# Altium PCB EncoderDebouncer.PcbDoc
Units mil, origin at the board's own origin, x right, y up, seen from the top; angles counter-clockwise.
Board outline 534.98 x 745.08 mil, 2 copper layers (Top Layer, Bottom Layer); 7 components, 6 nets, 26 pads, 2 vias.
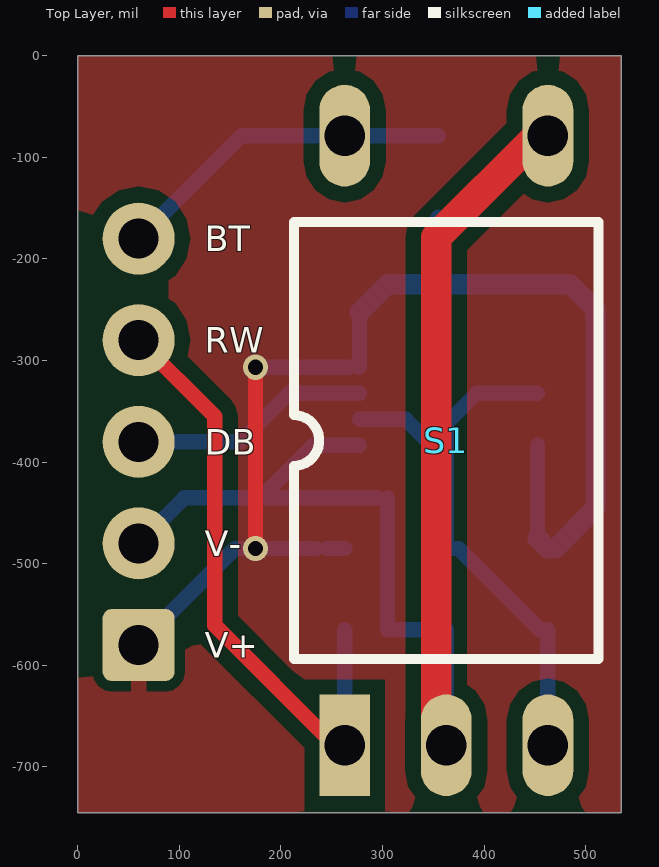
[diagram p0: Top Layer view]
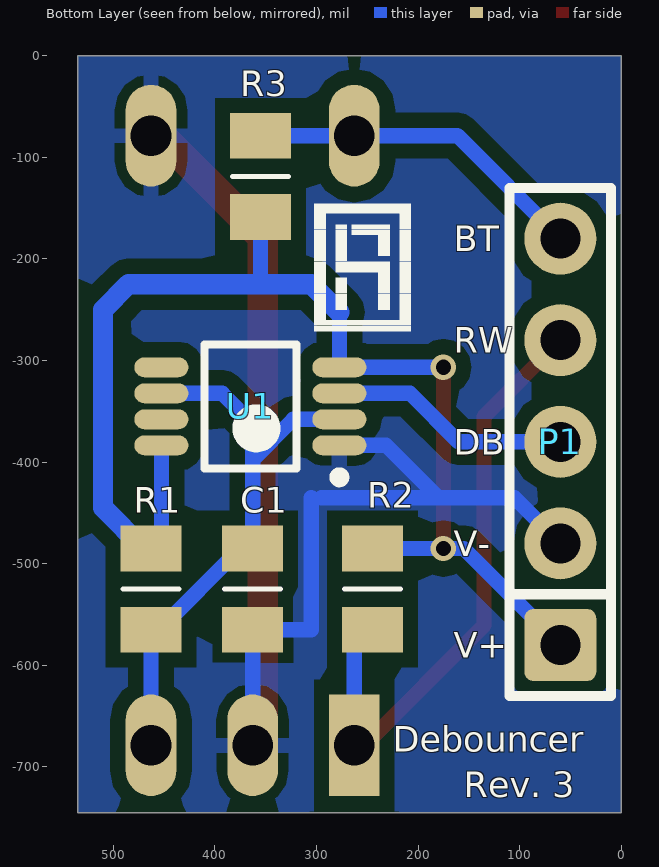
[diagram p1: Bottom Layer view, seen from below]

## Layer stack, top to bottom
Top Solder: solder mask 0.4, Solder Resist, Dk 3.5
Top Layer: signal copper 1.4
Dielectric 1: dielectric 12.6, FR-4, Dk 4.8
Bottom Layer: signal copper 1.4
Bottom Solder: solder mask 0.4, Solder Resist, Dk 3.5

## Board outline
0.02,-745 535,-745 535,0.08 0.02,0.08

## Design rules (kind name [scope] priority, off if disabled: settings)
Clearance PourClearance [InPolygon] p1: gap=15 ignorepadtopadclearanceinfootprint=TRUE except(0.1: Fill-Text Poly-Text Region-Text)
Clearance [All] p2: gap=6 ignorepadtopadclearanceinfootprint=TRUE
ComponentClearance [All] p1 off: gap=10 collisioncheckmode=3 verticalgap=10 showdistances=FALSE
Height [All] p1 off: minheight=0 maxheight=1000 prefheight=500
HoleSize [All] p1: absolutevalues=TRUE maxlimit=99999 minlimit=11.81 maxpercent=80.000 minpercent=20.000
PolygonConnect [All] p1: thpad.connectstyle=Relief thpad.reliefconductorwidth=15 thpad.reliefentries=4 thpad.polygonreliefangle="90 Angle" thpad.airgapwidth=10 smdpad.connectstyle=Relief smdpad.reliefconductorwidth=15 smdpad.reliefentries=4 smdpad.polygonreliefangle="90 Angle" smdpad.airgapwidth=10 via.connectstyle=Direct via.reliefconductorwidth=15 via.reliefentries=4 via.polygonreliefangle="90 Angle" via.airgapwidth=10
RoutingVias [All] p1: holewidth=15 width=25 viastyle="Through Hole" minholewidth=15 minwidth=25 maxholewidth=28 maxwidth=50
SilkToSilkClearance [All] p1 off: silktosilkclearance=10
SilkToSolderMaskClearance [IsPad] p1 off: minsilkscreentomaskgap=10 clearancetoexposedcopper=TRUE
SolderMaskExpansion [All] p1: expansion=4
Width [All] p1: maxlimit=50 minlimit=6 preferedwidth=10
25 further rules are at their usual default settings.

## Components (designator, comment, footprint, x,y, rotation, side; value= is the part's Value field where it differs from the comment)
C1 "Cap" 0805-CAP 362.77,-525 r90 bottom value=0.1uF
P1 "Header 5" "Pin Header 1x5 TH Pitch 2.54mm" 60,-580 r90 bottom
R1 "Res1" 0805-RES 462.77,-525 r90 bottom value=10K
R2 "Res1" 0805-RES 245,-525 r90 bottom value=10K
R3 "Res1" 0805-RES 355,-118.66 r270 bottom value=10K
S1 "Rotary Encoder" Encoder 262.77,-678.66 r90 top locked
U1 "555" TI-LM555 365,-345 r0 bottom

## Footprints (in the part's own frame and the unit in brackets; to place one, negate y for a bottom-side part, rotate by r counter-clockwise, add the part's x,y. Pads: shape width x height; smd on the part's side, far side on the other; paste and mask are expansions set on the pad)
0805-CAP [mil]
  rect 45x60 smd: 1(-40,0) 2(40,0)
  silkscreen extent 0,-28 0,28, body extent -39,-24 39,24, height 28
0805-RES [mil]
  rect 45x60 smd: 1(-40,0) 2(40,0)
  silkscreen extent 0,-28 0,28, body extent -39,-24 39,24, height 18
Encoder [mil]
  rect 100x50 hole 40: 1(0,0)
  oval 100x50 hole 40: 2(0,-100) 3(0,-200) 4(600,-200) 5(600,0)
  silkscreen extent 85,-250 515,50, body extent -6,-331 608,130, height 1018
"Pin Header 1x5 TH Pitch 2.54mm" [mm] "PinHeader 1x5 TH Pitch 2.54mm"
  rrect25% 1.8x1.8 hole 1: 1(0,0)
  round 1.8 hole 1: 2(2.54,0) 3(5.08,0) 4(7.62,0) 5(10.16,0)
  silkscreen extent -1.27,-1.27 11.43,1.27, body extent -1.27,-1.27 11.43,1.27, height 9.5
TI-LM555 [mm]
  oval 1.35x0.5 smd: 1(-2.225,0.975) 2(-2.225,0.325) 3(-2.225,-0.325) 4(-2.225,-0.975) 5(2.225,-0.975) 6(2.225,-0.325) 7(2.225,0.325) 8(2.225,0.975)
  silkscreen extent -2.35,-1.55 1.15,1.9, body extent -2.45,-1.55 2.45,1.55, height 1.1

## Part data
C1: "Capacitor", LatestRevisionDate=17-Jul-2002, LatestRevisionNote="Re-released for DXP Platform.", PackageDescription="Radial Cap, Thru-Hole; 2 Leads; 0.3 in Pin Spacing", PackageReference=RAD-0.3, Published=8-Jun-2000, Publisher="Altium Limited"
P1: "Header, 5-Pin", LatestRevisionDate=17-Jul-2002, LatestRevisionNote="Re-released for DXP Platform.", Publisher="Altium Limited"
R1 R2 R3: "Resistor", LatestRevisionDate=17-Jul-2002, LatestRevisionNote="Re-released for DXP Platform.", PackageDescription="Axial Device, Thru-Hole; 2 Leads; 0.3 in Pin Spacing", PackageReference=AXIAL-0.3, Published=8-Jun-2000, Publisher="Altium Limited"

## Via types
v1: diameter 25, hole 15, Top Layer to Bottom Layer, tented both sides, 2 vias

## Nets (pads, with @x,y where several pads share a name; then routed paths per layer and width w, separated by ;. In a path a pad name is that pad's centre, name@x,y a point inside that pad or via, vN(x,y) a via of type N, cw(c..) or ccw(c..) an arc to the next point about the centre after c; other vN are vias at no path point)
Button: P1.5 R3.1 S1.5 | length 327
  Bottom Layer w15: P1.5 161.34,-78.66 S1.5@252.77,-78.66 ; S1.5 R3.1
GND: C1.1 P1.2 S1.2 S1.4 U1.1 | length 1315.3
  Top Layer w30: S1.2@352.77,-678.66 352.77,-178.66 S1.4@452.77,-78.66
  Bottom Layer w15: P1.2 105,-435 180,-435 ; U1.1 231.61,-383.39 180,-435 ; 295,-435 180,-435 ; 305,-435 305,-565 C1.1 S1.2
NetC1_2: C1.2 R1.1 S1.3 U1.2 U1.6 | length 573.8
  Bottom Layer w15: U1.2 322.8,-357.8 362.77,-397.77 ; U1.6 392.8,-332.2 362.77,-362.23 362.77,-397.77 ; S1.3 R1.1 455,-565 375,-485 C1.2 362.77,-397.77
Out-Debounced: P1.3 U1.3 | length 237.2
  Bottom Layer w15: P1.3 160,-380 207.8,-332.2 U1.3
Out-Raw: P1.4 R2.1 S1.1 | length 592.2
  Top Layer w15: P1.4 135,-355 135,-560.89 S1.1@252.77,-678.66
  Bottom Layer w15: S1.1 R2.1@262.77,-565
Vcc: P1.1 R1.2 R2.2 R3.2 U1.4 U1.8 | length 1242.3
  Top Layer w15: v1(175,-485) v1(175,-306.61)
  Bottom Layer w15: P1.1 155,-485 v1(175,-485) R2.2@235,-485 ; v1(175,-306.61) U1.4@267.4,-306.61 ; R2.2 R2.2@262.77,-485 ; U1.4 277.4,-252.6 ; 355,-225 R3.2 ; R1.2@452.6,-474.83 U1.8
  Bottom Layer w20: 277.4,-252.6 305,-225 355,-225 485,-225 510,-250 510,-445 470,-485 R1.2 R1.2@452.6,-474.83
pads on no net: U1.5 U1.7

## Polygon pours and split planes (outlines as drawn)
GND on Bottom Layer "GND-Fill" (solid, pour order 10): 535,0 0,0 0,-745 535,-745
Vcc on Top Layer "VCC Fill" (solid, pour order 12): 535,0 535,-745 0,-745 0,0

## Silkscreen, mask and mechanical layers (free items; w line width, h text height)
Top Overlay:
  text "BT" at 125,-192.5 h25
  text "RW" at 125,-292.5 h25
  text "DB" at 125,-392.5 h25
  text "V-" at 125,-492.5 h25
  text "V+" at 125,-592.5 h25
Bottom Overlay:
  drawing of 378 lines, arcs and shapes, not listed
  text "BT" at 165,-192.5 h25
  text "RW" at 165,-292.5 h25
  text "DB" at 165,-392.5 h25
  text "V-" at 165,-492.5 h25
  text "V+" at 165,-592.5 h25
  text "Debouncer" at 225,-685 h25
  text "Rev. 3" at 155,-730 h25
Mechanical 1:
  the board outline again, w5